# EAGLE board PWM Venti (EAGLE 9.7.0)

Size 161.47 x 113.39 mm. Coordinates in mm from the lower left corner, seen from the top.
Outline: 0,0 161.47,0 161.47,113.39 0,113.39 0,0
Copper layers (1*16): Top 0.035mm / dielectric 1.5mm / Bottom 0.035mm
Design rules "default": minimum track width 6mil, minimum drill 0.35mm, track to track 6mil, track to pad 6mil, pad to pad 6mil, via to via 6mil, smd to smd 6mil, copper to edge 40mil, drill to drill 6mil, minimum pad ring 10mil, minimum via ring 8mil, stop-mask expansion 4mil, vias tented up to drill 0mil, thermal gap 10mil

## Footprints (pad centres in the part's own frame; a part is rotated, then mirrored left to right if it is on the bottom)
MOTOR = drill 1.118 pad 3.15 octagon: + 2.54,0; - -2.54,0
RESAD1016W63L850D250B = drill 0.83 pad 1.43: 1 -5.08,0; 2 5.08,0
TO92 = drill 0.813 octagon: 1 -1.27,0; 2 0,1.905; 3 1.27,0
ARDUINO-UNO-R3-SHIELD = drill 1.016 pad 1.88: 3.3V 24.13,-2.54; 5V 24.13,0; A0 24.13,12.7; A1 24.13,15.24; A2 24.13,17.78; A3 24.13,20.32; A4 24.13,22.86; A5 24.13,25.4; AREF -24.13,-13.97; D2 -24.13,20.32; D3 -24.13,17.78; D4 -24.13,15.24; D5 -24.13,12.7; D6 -24.13,10.16; D7 -24.13,7.62; D8 -24.13,3.81; D9 -24.13,1.27; D10 -24.13,-1.27; D11 -24.13,-3.81; D12 -24.13,-6.35; D13 -24.13,-8.89; GND@0 24.13,2.54; GND@1 24.13,5.08; GND@2 -24.13,-11.43; IOREF 24.13,-7.62; NC 24.13,-10.16; RES 24.13,-5.08; RX -24.13,25.4; SCL -24.13,-19.05; SDA -24.13,-16.51; TX -24.13,22.86; VIN 24.13,7.62
JHD-162A = drill 1.016 long: 1 -19.05,0; 2 -16.51,0; 3 -13.97,0; 4 -11.43,0; 5 -8.89,0; 6 -6.35,0; 7 -3.81,0; 8 -1.27,0; 9 1.27,0; 10 3.81,0; 11 6.35,0; 12 8.89,0; 13 11.43,0; 14 13.97,0; 15 16.51,0; 16 19.05,0

## Placement (x,y rotation side)
M1  MOTOR_HDR  [MOTOR]  109.2,29.45 270 top
R1  1k  [RESAD1016W63L850D250B]  101.58,9.13 0 top
R2  220  [RESAD1016W63L850D250B]  129.52,54.85 0 top
T1  NPN  [TO92]  109.2,9.13 270 top
UARDUINO_UNO_R3  ARDUINO-UNO-R3-SHIELD  [ARDUINO-UNO-R3-SHIELD]  29.84,34.52 180 top
UHŐMÉRSÉKLET_SZENZOR  TMP36GT9Z_TO92  [TO92]  109.2,44.69 270 top
ULCD  LCD-16X2JHD-162A  [JHD-162A]  105.85,105.85 0 top

## Library data of the parts
M1 R1 R2 UARDUINO_UNO_R3 UHŐMÉRSÉKLET_SZENZOR ULCD = Tinkercad
T1 = Tinkercad; CATEGORY: Transistor; SUB-CATEGORY: BJT; TYPE: NPN

## Nets
M1_-: M1.- T1.1
T1_B: R1.2 T1.2
UARDUINO_UNO_R3_5V: M1.+ R2.2 UARDUINO_UNO_R3.5V UHŐMÉRSÉKLET_SZENZOR.3 ULCD.2
UARDUINO_UNO_R3_A0: UARDUINO_UNO_R3.A0 UHŐMÉRSÉKLET_SZENZOR.2
UARDUINO_UNO_R3_D2: UARDUINO_UNO_R3.D2 ULCD.14
UARDUINO_UNO_R3_D3: UARDUINO_UNO_R3.D3 ULCD.13
UARDUINO_UNO_R3_D4: UARDUINO_UNO_R3.D4 ULCD.12
UARDUINO_UNO_R3_D5: UARDUINO_UNO_R3.D5 ULCD.11
UARDUINO_UNO_R3_D9: R1.1 UARDUINO_UNO_R3.D9
UARDUINO_UNO_R3_D11: UARDUINO_UNO_R3.D11 ULCD.6
UARDUINO_UNO_R3_D12: UARDUINO_UNO_R3.D12 ULCD.4
UARDUINO_UNO_R3_GND: T1.3 UARDUINO_UNO_R3.GND@0 UARDUINO_UNO_R3.GND@1 UARDUINO_UNO_R3.GND@2 UHŐMÉRSÉKLET_SZENZOR.1 ULCD.1 ULCD.3 ULCD.5 ULCD.16
ULCD_LED+: R2.1 ULCD.15

## Tracks (layer width: path | path; a pad name or v marks a point on that pad's centre or on a via)
M1_-  (1 unrouted)
T1_B  (1 unrouted)
UARDUINO_UNO_R3_5V  (4 unrouted)
UARDUINO_UNO_R3_A0  (1 unrouted)
UARDUINO_UNO_R3_D2  (1 unrouted)
UARDUINO_UNO_R3_D3  (1 unrouted)
UARDUINO_UNO_R3_D4  (1 unrouted)
UARDUINO_UNO_R3_D5  (1 unrouted)
UARDUINO_UNO_R3_D9  (1 unrouted)
UARDUINO_UNO_R3_D11  (1 unrouted)
UARDUINO_UNO_R3_D12  (1 unrouted)
UARDUINO_UNO_R3_GND  (8 unrouted)
ULCD_LED+  (1 unrouted)